# EAGLE board NQSMHS-V2.5 (EAGLE 6.5.0)
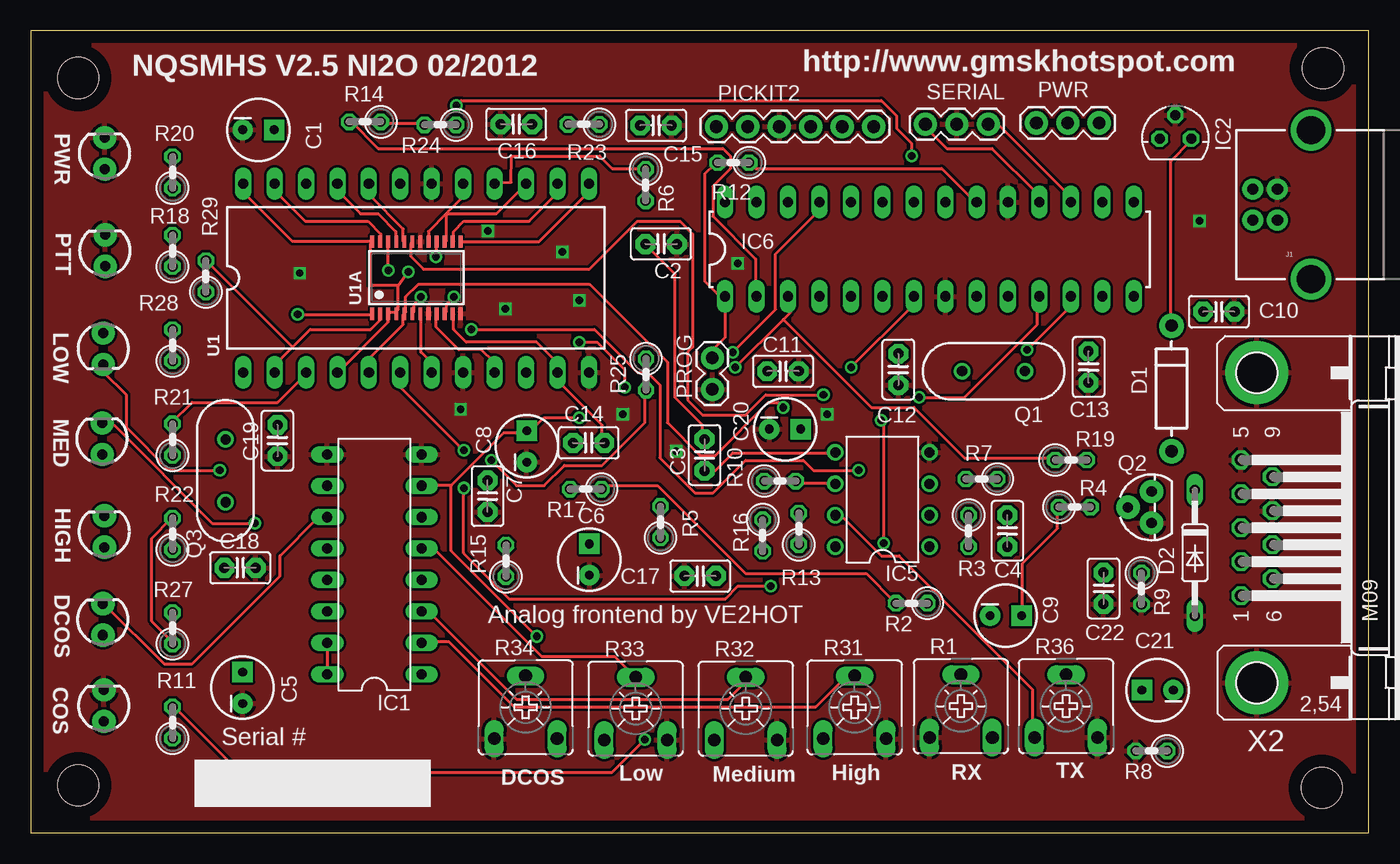
[diagram p0: board, top side]
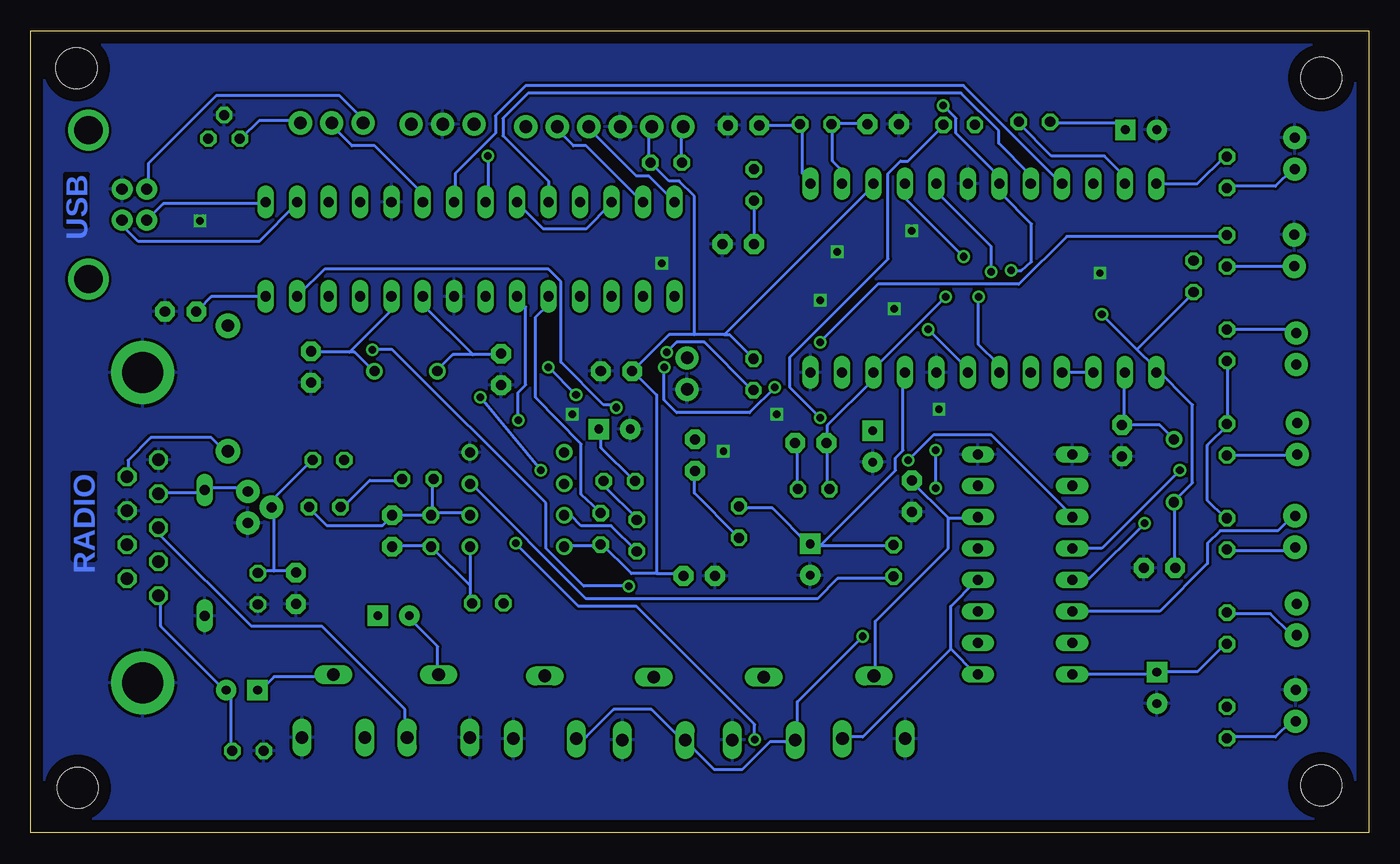
[diagram p1: board, bottom side, seen from below]

Size 108.03 x 64.76 mm. Coordinates in mm from the lower left corner, seen from the top.
Outline: 108.03,0 108.03,64.76 0,64.76 0,0 108.03,0
Copper layers (1*16): Top 0.035mm / dielectric 1.5mm / Bottom 0.035mm
Design rules "default": minimum track width 10mil, minimum drill 24mil, track to track 8mil, track to pad 8mil, pad to pad 8mil, via to via 8mil, smd to smd 8mil, copper to edge 40mil, drill to drill 8mil, minimum pad ring 10mil, minimum via ring 8mil, stop-mask expansion 4mil, vias tented up to drill 0mil, thermal gap 10mil

## Footprints (pad centres in the part's own frame; a part is rotated, then mirrored left to right if it is on the bottom)
CPOL-RADIAL-10UF-25V = drill 0.7 pad 1.651 square: 1 1.27,0 | drill 0.7 pad 1.651: 2 -1.27,0
C2.5-2 = drill 0.813 pad 1.6 octagon: 1 -1.27,0; 2 1.27,0
DIODE-1N4001 = drill 1 pad 1.981: A -5.08,0; C 5.08,0
DO35-10 = drill 0.813 long: A 5.08,0; C -5.08,0
DIL16 = drill 0.813 long: 1 -8.89,-3.81; 2 -6.35,-3.81; 3 -3.81,-3.81; 4 -1.27,-3.81; 5 1.27,-3.81; 6 3.81,-3.81; 7 6.35,-3.81; 8 8.89,-3.81; 9 8.89,3.81; 10 6.35,3.81; 11 3.81,3.81; 12 1.27,3.81; 13 -1.27,3.81; 14 -3.81,3.81; 15 -6.35,3.81; 16 -8.89,3.81
78LXX = drill 0.813 octagon: GND 0,1.905; IN 1.27,0; OUT -1.27,0
DIL08 = drill 0.813 pad 1.27: 1 -3.81,-3.81; 2 -1.27,-3.81; 3 1.27,-3.81; 4 3.81,-3.81; 5 3.81,3.81; 6 1.27,3.81; 7 -1.27,3.81; 8 -3.81,3.81
DIL28-3 = drill 0.813 long: 1 -16.51,-3.81; 2 -13.97,-3.81; 3 -11.43,-3.81; 4 -8.89,-3.81; 5 -6.35,-3.81; 6 -3.81,-3.81; 7 -1.27,-3.81; 8 1.27,-3.81; 9 3.81,-3.81; 10 6.35,-3.81; 11 8.89,-3.81; 12 11.43,-3.81; 13 13.97,-3.81; 14 16.51,-3.81; 15 16.51,3.81; 16 13.97,3.81; 17 11.43,3.81; 18 8.89,3.81; 19 6.35,3.81; 20 3.81,3.81; 21 1.27,3.81; 22 -1.27,3.81; 23 -3.81,3.81; 24 -6.35,3.81; 25 -8.89,3.81; 26 -11.43,3.81; 27 -13.97,3.81; 28 -16.51,3.81
USB-B-PTH = drill 0.914 pad 1.676: D+ 0,1.25; D- 1.981,1.25; GND 0,-1.25; VBUS 1.981,-1.25 | drill 2.286: P$1 -2.718,-6.02; P$2 -2.718,6.02
STAND-OFF = hole 3.302: 0,0
LED3MM = drill 0.813 pad 1.88: A -1.27,0; K 1.27,0
1X06 = drill 1.016 pad 1.88: 1 0,0; 2 2.54,0; 3 5.08,0; 4 7.62,0; 5 10.16,0; 6 12.7,0
1X02 = drill 1.016 pad 1.88: 1 0,0; 2 2.54,0
1X03 = drill 1.016 pad 1.88: 1 0,0; 2 2.54,0; 3 5.08,0
HC49US = drill 0.813: 1 -2.54,0; 2 2.54,0
TO-92 = drill 0.813 pad 1.88: 1 -1.27,0; 2 0,1.905; 3 1.27,0
CA6V = drill 1.016 long: A -2.54,-2.54; E 2.54,-2.54; S 0,2.54
0207/2V = drill 0.813 octagon: 1 -1.27,0; 2 1.27,0
DIL24-6 = drill 0.813 long: 1 -13.97,-7.62; 2 -11.43,-7.62; 3 -8.89,-7.62; 4 -6.35,-7.62; 5 -3.81,-7.62; 6 -1.27,-7.62; 7 1.27,-7.62; 8 3.81,-7.62; 9 6.35,-7.62; 10 8.89,-7.62; 11 11.43,-7.62; 12 13.97,-7.62; 13 13.97,7.62; 14 11.43,7.62; 15 8.89,7.62; 16 6.35,7.62; 17 3.81,7.62; 18 1.27,7.62; 19 -1.27,7.62; 20 -3.81,7.62; 21 -6.35,7.62; 22 -8.89,7.62; 23 -11.43,7.62; 24 -13.97,7.62
TSSOP24 = smd 0.305 x 0.991: 1 -3.575,-2.918; 2 -2.925,-2.918; 3 -2.275,-2.918; 4 -1.625,-2.918; 5 -0.975,-2.918; 6 -0.325,-2.918; 7 0.325,-2.918; 8 0.975,-2.918; 9 1.625,-2.918; 10 2.275,-2.918; 11 2.925,-2.918; 12 3.575,-2.918; 13 3.575,2.918; 14 2.925,2.918; 15 2.275,2.918; 16 1.625,2.918; 17 0.975,2.918; 18 0.325,2.918; 19 -0.325,2.918; 20 -0.975,2.918; 21 -1.625,2.918; 22 -2.275,2.918; 23 -2.925,2.918; 24 -3.575,2.918
M09HP = drill 1.016 octagon: 1 -5.486,1.27; 2 -2.743,1.27; 3 0,1.27; 4 2.743,1.27; 5 5.486,1.27; 6 -4.115,-1.27; 7 -1.372,-1.27; 8 1.372,-1.27; 9 4.115,-1.27 | drill 3.302 pad 5.08: G1 -12.522,0; G2 12.522,0

## Placement (x,y rotation side)
C1  10uF  [CPOL-RADIAL-10UF-25V]  18.37,56.78 0 top
C2  470pF  [C2.5-2]  50.9,47.55 180 top
C3  0.22uF  [C2.5-2]  54.4,30.5 90 top
C4  330p  [C2.5-2]  78.86,24.37 270 top
C5  47uF  [CPOL-RADIAL-10UF-25V]  17.09,11.7 90 top
C6  1uF  [CPOL-RADIAL-10UF-25V]  45.1,22.06 90 top
C7  0.1uF  [C2.5-2]  36.88,27.18 270 top
C8  10uF  [CPOL-RADIAL-10UF-25V]  40.04,31.19 90 top
C9  10uF  [CPOL-RADIAL-10UF-25V]  78.73,17.52 0 top
C10  0.1uF  [C2.5-2]  95.94,42.08 0 top
C11  0.1uF  [C2.5-2]  60.74,37.27 0 top
C12  22pF  [C2.5-2]  70.05,37.41 90 top
C13  22pF  [C2.5-2]  85.42,37.61 270 top
C14  22pF  [C2.5-2]  45.04,31.49 180 top
C15  0.027uF  [C2.5-2]  50.48,57.13 0 top
C16  0.027uF  [C2.5-2]  39.2,57.23 180 top
C17  0.1uF  [C2.5-2]  54.05,20.73 0 top
C18  22pF  [C2.5-2]  16.89,21.39 0 top
C19  22pF  [C2.5-2]  19.91,31.67 90 top
C20  [CPOL-RADIAL-10UF-25V]  60.9,32.6 0 top
C21  22uF  [CPOL-RADIAL-10UF-25V]  90.99,11.52 180 top
C22  100pF  [C2.5-2]  86.63,19.73 90 top
D1  1N4001  [DIODE-1N4001]  92.11,35.88 90 top
D2  1N4148  [DO35-10]  94,22.6 270 top
IC1  MAX8213  [DIL16]  27.74,21.67 90 top
IC2  78L05  [78LXX]  92.43,56.06 0 top
IC5  LM4558N  [DIL08]  68.77,26.91 90 top
IC6  PIC18F2550  [DIL28-3]  72.57,47.13 0 top
J1  USBPTH  [USB-B-PTH]  100.67,50.73 180 top
JP7  STAND-OFF  [STAND-OFF]  3.81,3.81 0 top
JP8  STAND-OFF  [STAND-OFF]  104.25,3.61 0 top
JP9  STAND-OFF  [STAND-OFF]  3.81,60.96 0 top
JP10  STAND-OFF  [STAND-OFF]  104.35,61.76 0 top
LED1  COS  [LED3MM]  5.89,10.26 90 top
LED2  MED  [LED3MM]  5.75,31.82 90 top
LED3  PWR  [LED3MM]  5.96,54.87 90 top
LED8  PTT  [LED3MM]  5.99,47.02 90 top
LED10  LOW  [LED3MM]  5.83,39.08 270 top
LED11  DCOS  [LED3MM]  5.81,17.22 90 top
LED12  HIGH  [LED3MM]  5.93,24.32 90 top
PICKIT2  PICKIT2  [1X06]  55.36,57.03 0 top
PROG  Program  [1X02]  55.04,35.8 90 top
PWR  PWR  [1X03]  86.28,57.33 180 top
Q1  24MHz  [HC49US]  77.75,37.27 180 top
Q2  2N3904  [TO-92]  90.51,26.28 90 top
Q3  4.9152MHz  [HC49US]  15.72,29.23 90 top
R1  1K  [CA6V]  75.11,10.22 0 top
R2  100K  [0207/2V]  71.14,18.52 180 top
R3  180K  [0207/2V]  75.72,24.37 270 top
R4  75K  [0207/2V]  84.3,26.3 0 top
R5  510K  [0207/2V]  50.85,25.09 90 top
R6  100K  [0207/2V]  49.65,52.31 270 top
R7  75K  [0207/2V]  76.79,28.56 180 top
R8  10K  [0207/2V]  90.5,6.6 180 top
R9  10K  [0207/2V]  89.7,19.7 270 top
R10  [0207/2V]  60.5,28.4 0 top
R11  1K  [0207/2V]  11.43,8.89 90 top
R12  10K  [0207/2V]  56.73,54.12 180 top
R13  47K  [0207/2V]  62.02,24.54 90 top
R14  27K  [0207/2V]  26.99,57.42 180 top
R15  510K  [0207/2V]  38.36,21.95 90 top
R16  0R  [0207/2V]  59.1,24 270 top
R17  100K  [0207/2V]  44.81,27.75 180 top
R18  4k7  [0207/2V]  11.43,46.99 90 top
R19  1K  [0207/2V]  84,30.1 0 top
R20  1K  [0207/2V]  11.43,53.34 90 top
R21  470R  [0207/2V]  11.43,31.75 90 top
R22  470R  [0207/2V]  11.43,24.13 90 top
R23  1M  [0207/2V]  44.64,57.22 180 top
R24  27K  [0207/2V]  33.06,57.18 180 top
R25  47K  [0207/2V]  49.67,37.01 270 top
R27  470R  [0207/2V]  11.43,16.51 90 top
R28  470R  [0207/2V]  11.43,39.37 90 top
R29  1M  [0207/2V]  14.13,44.93 90 top
R31  100K  [CA6V]  66.52,10.12 0 top
R32  100K  [CA6V]  57.73,10.02 0 top
R33  100K  [CA6V]  48.84,10.02 0 top
R34  10K  [CA6V]  39.95,10.12 0 top
R36  4k7  [CA6V]  83.6,10.22 0 top
SERIAL  SERIAL  [1X03]  72.24,57.23 0 top
U1  CMX589AP4  [DIL24-6]  31.1,44.8 0 top
U1A  CMX589AE2  [TSSOP24]  31.13,44.83 0 top
X2  DB9M  [M09HP]  99,24.63 90 top

## Library data of the parts
C1 C5 C6 C8 C9 C20 C21 D1 IC6 J1 JP7-JP10 LED1-LED3 LED8 LED10-LED12 PICKIT2 PROG PWR Q1-Q3 SERIAL = SparkFun
C2-C4 C7 C10-C19 C22 = capacitor-wima
D2 = diode-1
IC1 = ic-package
IC2 = v-reg
IC5 = linear
R1 R31-R34 R36 = pot
R2-R25 R27-R29 = resistor
U1 U1A = cml-micro
X2 = con-subd

## Nets
+5V: J1.VBUS PWR.3
+12V: D1.A X2.9
COS/COR/SQL: X2.2
DCOS: IC1.11 IC6.25 LED11.K R25.2
GND: C1.2 C2.1 C5.2 C6.2 C7.2 C8.2 C10.2 C11.2 C12.1 C13.2 C15.2 C16.2 C17.1 C18.2 C19.1 C20.2 C22.1 D2.A IC1.8 IC1.9 IC2.GND IC5.4 IC6.8 IC6.19 J1.GND LED1.K LED3.K LED8.K PICKIT2.3 PROG.1 Q2.1 R1.A R8.2 R9.2 R31.E R32.E R33.E R34.A R36.E SERIAL.2 U1.8 U1.12 U1.18 U1A.8 U1A.12 U1A.18 X2.5 X2.8 X2.G1 X2.G2
N$1: C15.1 R23.1 U1.13 U1A.13
N$2: D1.C IC2.IN
N$3: IC6.23 IC6.26
N$4: IC6.5 R13.2
N$5: IC6.6 R11.2
N$6: LED1.A R11.1
N$8: C2.2 C3.2 R6.2
N$9: C12.2 IC6.9 Q1.2
N$10: C13.1 IC6.10 Q1.1
N$11: C10.1 IC6.14
N$12: IC2.OUT PWR.1
N$13: LED3.A R20.1
N$14: C7.1 IC1.6 R34.S
N$15: C22.2 Q2.2 R9.1 R19.2
N$16: IC1.14 LED12.K
N$17: LED8.A R18.1
N$18: C9.2 R1.S
N$19: IC5.7 R16.2 R36.A
N$20: C9.1 R4.1 R7.1
N$21: C16.1 R23.2 U1.14 U1A.14
N$22: C18.1 Q3.1 R29.1 U1.1 U1A.1
N$23: C4.2 IC5.1 R2.1 R3.2
N$24: C19.2 Q3.2 R29.2 U1.2 U1A.2
N$25: C3.1 IC5.5 R5.1
N$26: C4.1 IC5.2 R3.1 R4.2 R7.2
N$27: IC5.6 R10.2 R16.1
N$28: C20.1 R10.1
N$29: C21.1 R36.S
N$32: U1.22
N$40: IC5.3 R15.1
N$41: LED12.A R22.1
N$44: IC1.13 LED2.K
N$45: LED2.A R21.1
N$46: IC1.12 LED10.K
N$47: LED11.A R27.2
N$48: LED10.A R28.2
N$49: IC1.2 R31.S
N$50: IC1.3 R32.S
N$51: IC1.5 R33.S
N$52: IC1.1 IC1.4 R34.E
N$53: C8.1 IC1.7 R24.1 R31.A R32.A R33.A
PGC: IC6.27 PICKIT2.5
PGD: IC6.28 PICKIT2.4
PLLACQ: IC6.11 U1.7 U1A.7
PTT: IC6.3 R18.2 R19.1
RCFB: C14.2 R17.2 U1.10 U1A.10
RPT: IC6.4
RX-232: IC6.18 SERIAL.1
RXCLOCK: IC6.21 U1.21 U1A.21
RXDATA: IC6.24 U1.20 U1A.20
RXDATA/SPKR: R1.E X2.3
RXDCACQ: IC6.12 U1.6 U1A.6
RXHOLD: IC6.13 U1.5 U1A.5
RXSIGIN: C14.1 R2.2 R17.1 U1.11 U1A.11
RXSN: R14.1 R24.2 U1.23 U1A.23
TRXPTT: D2.C Q2.3 X2.4
TX-232: IC6.17 SERIAL.3
TX/SN: C1.1 IC6.2 R14.2
TXCLOCK: IC6.22 U1.19 U1A.22
TXDATA: IC6.7 U1A.19
TXDATA/MIC: C21.2 R8.1 X2.1
TXOUT: R6.1 U1.16 U1A.16
USB+: IC6.16 J1.D+
USB-: IC6.15 J1.D-
VBIAS: C6.1 R5.2 R15.2 U1.9 U1A.9
VCC: C5.1 C11.1 C17.2 IC1.15 IC1.16 IC5.8 IC6.20 PICKIT2.2 PWR.2 R12.1 R13.1 R20.2 R21.2 R22.2 R25.1 R27.1 R28.1 U1.3 U1.4 U1.15 U1.17 U1.24 U1A.3 U1A.4 U1A.15 U1A.17 U1A.24
VPP: IC6.1 PICKIT2.1 PROG.2 R12.2

## Tracks (layer width: path | path; a pad name or v marks a point on that pad's centre or on a via)
+5V
  Bottom 0.254: J1.VBUS 98.55,52.02 98.55,54.05 93.07,59.54 83.11,59.54 81.08,57.51 PWR.3
+12V
  Bottom 0.254: X2.9 100.18,28.85 100.18,30.07 98.35,31.9 93.47,31.9 92.25,30.68 D1.A
DCOS  (via drill 0.61)
  Top 0.254: IC1.11 23.77,25.4 23.16,25.4 20.12,22.35 20.12,20.73 13.01,13.61 10.77,13.61 5.89,18.49 LED11.K | v56.69,38.81 60.15,42.27 60.15,46.74 63.6,50.19 63.6,50.8 IC6.25 | v37.19,30.07 39.22,28.04 41.45,28.04 43.08,29.67 46.13,29.67 49.58,33.12 49.58,35.56 R25.2
  Bottom 0.254: v56.69,38.81 55.88,39.62 53.65,39.62 49.78,35.76 R25.2 | v37.19,30.07 35.15,32.11 30.48,32.11 23.98,25.6 IC1.11
GND  (via drill 0.6)
  other vias: 44.3,43 47.8,33.8 42.9,46.9 57.1,46 34.7,34.2 38.3,42.3 36.9,48.6 52.1,30.8 21.7,45.2 94.4,49.4 64.3,33.8
  pour Bottom: -0.1,64.77 108.06,64.87 107.96,0 0,0
  pour Top: 0,-0.23 107.95,-0.03 108.05,64.85 0.1,64.75
N$1
  Top 0.254: U1A.13 34.75,47.75 41.05,47.75 44.91,51.61 44.91,52.22 U1.13
  Bottom 0.254: C15.1 49.17,57.1 45.92,57.1 R23.1 45.72,57.1 45.72,53.24 44.91,52.43 U1.13
N$2
  Top 0.254: IC2.IN 93.67,55.88 92.05,54.25 92.05,41.05 D1.C
N$3
  Bottom 0.254: IC6.26 61.16,50.8 63.2,48.77 66.65,48.77 68.68,50.8 IC6.23
N$4
  Bottom 0.254: R13.2 62.18,26.01 63.6,27.33 63.6,31.39 67.26,35.15 67.26,41.66 66.24,42.67 66.24,43.28 IC6.5
N$5  (via drill 0.61)
  Top 0.254: v49.58,7.52 46.94,4.88 16.87,4.88 11.58,10.16 R11.2 | v68.89,23.37 68.89,33.12 v68.68,33.33
  Bottom 0.254: v49.58,7.52 49.58,8.74 59.13,18.29 63.8,18.29 v68.89,23.37 | v68.68,33.33 68.68,35.56 68.07,36.17 68.07,42.47 68.89,43.28 IC6.6
N$6
  Bottom 0.254: R11.1 11.38,7.72 7.52,7.72 6.3,8.94 5.89,8.94 LED1.A
N$8
  Top 0.254: C3.2 54.25,31.9 54.25,32.92 52.02,35.15 52.02,45.11 49.58,47.55 C2.2
  Bottom 0.254: R6.2 49.58,51 49.58,47.75 C2.2
N$9
  Bottom 0.254: 72.34,38.61 70.1,38.61 C12.2 | 72.34,38.61 73.97,38.61 75.18,37.39 Q1.2 | 72.34,38.61 76.2,42.47 76.2,43.28 IC6.9
N$10
  Bottom 0.254: 82.3,38.81 85.34,38.81 C13.1 | 82.3,38.81 81.89,38.81 80.47,37.39 Q1.1 | 82.3,38.81 79.05,42.06 79.05,43.28 IC6.10
N$11
  Bottom 0.254: IC6.14 89.2,43.28 93.47,43.28 94.49,42.27 C10.1
N$12
  Bottom 0.254: IC2.OUT 91.03,56.08 89.61,57.51 86.36,57.51 PWR.1
N$13
  Bottom 0.254: R20.1 11.38,52.22 7.52,52.22 6.1,53.65 LED3.A
N$14
  Bottom 0.254: 33.93,25.4 31.7,25.4 IC1.6 | 33.93,25.4 36.98,28.45 C7.1 | 33.93,25.4 33.93,22.96 39.83,17.07 39.83,12.8 R34.S
N$15
  Bottom 0.254: 88.39,21.13 86.77,21.13 C22.2 | 88.39,21.13 89.61,21.13 R9.1 | 88.39,27.03 88.59,26.82 88.59,26.42 Q2.2 88.39,27.03 | 88.39,27.03 85.34,30.07 R19.2 | 88.39,21.13 88.39,27.03
N$16
  Bottom 0.254: IC1.14 23.77,17.88 16.87,17.88 13.01,21.74 13.01,23.37 11.99,24.38 7.32,24.38 6.1,25.6 LED12.K
N$17
  Bottom 0.254: R18.1 6.1,45.72 LED8.A
N$18
  Bottom 0.254: R1.S 75.18,12.8 75.18,15.04 77.62,17.48 C9.2
N$19
  Top 0.254: R36.A 80.87,7.72 80.87,11.58 70.1,22.35 68.68,22.35 65.43,25.6 65.02,25.6 IC5.7
  Bottom 0.254: R16.2 59.13,22.76 61.16,24.79 63.6,24.79 64.41,25.6 64.82,25.6 IC5.7
N$20
  Top 0.254: C9.1 80.06,17.68 80.06,21.74 82.91,24.59 82.91,26.21 R4.1
  Bottom 0.254: R7.1 78.23,28.45 80.67,28.45 82.91,26.21 R4.1
N$21
  Top 0.254: U1A.14 34.14,47.75 34.14,48.56 34.95,49.38 40.23,49.38 42.47,51.61 42.47,52.22 U1.14
  Bottom 0.254: C16.1 40.64,57.3 43.28,57.3 R23.2 43.28,57.1 43.28,54.25 42.67,53.65 42.67,52.43 U1.14
N$22  (via drill 0.61)
  Top 0.254: v21.54,41.86 27.43,41.86 U1A.1
  Bottom 0.254: C18.1 15.65,21.54 15.65,26.62 Q3.1 15.65,26.82 14.22,28.25 14.22,34.54 17.27,37.59 | 17.27,37.59 18.69,39.01 | 18.69,39.01 v21.54,41.86 | 17.27,37.59 17.27,37.19 U1.1 17.27,37.59 | 18.69,39.01 14.22,43.48 R29.1
N$23
  Bottom 0.254: C4.2 78.84,23.16 75.79,23.16 R3.2 75.59,22.96 72.54,19.91 | 72.54,19.91 72.54,22.96 IC5.1 | 72.54,19.91 72.54,18.69 R2.1
N$24
  Top 0.254: 21.13,39.22 19.71,37.8 19.71,37.19 U1.2 | 21.13,39.22 22.55,40.64 27.43,40.64 28.25,41.45 28.25,41.86 U1A.2 | 21.13,39.22 14.22,46.13 R29.2
  Bottom 0.254: Q3.2 15.85,31.9 16.87,32.92 19.71,32.92 C19.2 19.71,33.12 19.71,36.98 U1.2
N$25
  Top 0.254: IC5.5 64.82,30.68 56.69,30.68 55.27,29.26 54.46,29.26 C3.1
  Bottom 0.254: R5.1 51,23.98 54.46,27.43 54.46,29.06 C3.1
N$26
  Bottom 0.254: 75.59,25.81 72.75,25.81 IC5.2 | 75.59,25.81 75.59,28.45 R7.2 | 75.59,25.81 R3.1 75.79,25.6 78.84,25.6 | 78.84,25.6 79.65,24.79 84.12,24.79 85.55,26.21 R4.2 | 78.84,25.6 C4.1
N$27
  Top 0.254: IC5.6 64.82,28.25 61.77,28.25 R10.2
  Bottom 0.254: R16.1 59.13,25.4 61.57,27.84 61.57,28.25 R10.2
N$28
  Bottom 0.254: R10.1 59.33,28.45 61.98,31.09 61.98,32.72 C20.1
N$29
  Bottom 0.254: R36.S 83.72,12.6 88.39,12.6 89.61,11.38 C21.1
N$40
  Bottom 0.254: R15.1 38.41,20.52 42.88,20.52 44.5,18.9 63.2,18.9 72.54,28.25 IC5.3
N$41
  Bottom 0.254: R22.1 11.38,22.76 6.3,22.76 6.1,22.96 LED12.A
N$44  (via drill 0.61)
  Top 0.254: v18.09,24.99 14.63,24.99 6.71,32.92 5.89,32.92 LED2.K
  Bottom 0.254: v18.09,24.99 22.55,20.52 23.77,20.52 IC1.13
N$45
  Bottom 0.254: R21.1 5.89,30.48 LED2.A
N$46  (via drill 0.61)
  Top 0.254: v15.24,29.26 11.18,29.26 7.72,32.72 7.72,35.36 5.89,37.19 5.89,37.8 LED10.K
  Bottom 0.254: v15.24,29.26 21.54,22.96 23.77,22.96 IC1.12
N$47
  Bottom 0.254: R27.2 11.38,17.68 7.92,17.68 6.3,16.05 5.89,16.05 LED11.A
N$48
  Bottom 0.254: R28.2 6.1,40.64 5.89,40.44 LED10.A
N$49
  Top 0.254: IC1.2 31.7,15.44 33.73,15.44 39.01,10.16 63.4,10.16 65.84,12.6 66.45,12.6 R31.S
N$50
  Top 0.254: IC1.3 31.7,17.68 32.31,17.68 39.22,10.77 56.29,10.77 57.91,12.39 R32.S
N$51
  Top 0.254: IC1.5 31.7,22.76 32.72,22.76 41.25,14.22 47.14,14.22 48.77,12.6 R33.S
N$52
  Bottom 0.254: 33.73,14.83 31.7,12.8 IC1.1 | 33.73,14.83 33.73,18.29 31.7,20.32 IC1.4 | 33.73,14.83 40.84,7.72 42.47,7.72 R34.E
N$53  (via drill 0.61)
  Top 0.254: 33.93,28.04 31.7,28.04 IC1.7 | 33.93,28.04 38.2,32.31 40.03,32.31 C8.1 40.23,32.31 41.45,33.53 v44.3,33.53 | v40.84,15.85 33.93,22.76 33.93,28.04
  Bottom 0.254: R31.A 63.8,7.72 63.2,7.72 60.96,9.96 57.91,9.96 55.27,7.32 R32.A 55.07,7.32 52.83,5.08 50.6,5.08 48.36,7.32 46.33,7.32 R33.A 46.13,7.52 46.13,10.57 v40.84,15.85 | v44.3,33.53 46.74,35.97 46.74,38.41 38.81,46.33 38.81,53.24 37.8,54.25 37.19,54.25 34.34,57.1 R24.1
PGC
  Bottom 0.254: IC6.27 58.73,51 63.2,55.47 64.21,55.47 65.63,56.9 PICKIT2.5
PGD
  Bottom 0.254: IC6.28 56.08,51 58.12,53.03 59.13,53.03 62.99,56.9 PICKIT2.4
PLLACQ  (via drill 0.61)
  Top 0.254: U1A.7 31.5,41.86 31.5,38.81 32.31,38 32.31,37.19 U1.7 | v71.73,35.15 75.39,35.15 81.28,41.05 81.28,43.28 IC6.11 | v66.84,29.26 63.2,29.26 62.38,30.07 57.71,30.07 55.07,27.43 53.65,27.43 50.8,30.28 50.8,36.17 49.78,37.19 48.97,37.19 45.52,40.64 v35.56,40.64
  Bottom 0.254: v66.84,29.26 v71.73,35.15 | v35.56,40.64 32.51,37.59 32.51,37.19 U1.7
PTT  (via drill 0.61)
  Top 0.254: v44.3,39.62 45.72,39.62 47.95,37.39 v47.95,35.97 | 60.76,41.45 61.37,42.06 61.37,43.08 61.16,43.28 IC6.3 | v56.9,37.59 60.76,41.45 | 60.76,41.45 67.87,34.34 71.32,34.34 75.39,30.28 82.7,30.28 R19.1
  Bottom 0.254: v44.3,39.62 39.62,44.3 28.25,44.3 24.38,48.16 11.58,48.16 R18.2 | v47.95,35.97 49.99,33.93 55.88,33.93 56.9,34.95 v56.9,37.59
RCFB  (via drill 0.61)
  Top 0.254: v34.14,43.28 33.53,42.67 33.53,42.06 U1A.10
  Bottom 0.254: R17.2 43.69,27.84 43.69,31.29 C14.2 43.69,31.5 43.69,32.92 40.03,36.58 40.03,36.98 U1.10 39.83,37.19 39.83,37.59 v34.14,43.28
RX-232
  Top 0.254: IC6.18 81.28,51 81.28,51.61 77.62,55.27 73.97,55.27 72.14,57.1 SERIAL.1
RXCLOCK
  Top 0.254: U1A.21 29.46,47.75 29.46,48.56 28.04,49.99 26.62,49.99 24.79,51.82 24.79,52.22 U1.21
  Bottom 0.254: IC6.21 73.76,51 73.76,53.24 70.51,56.49 70.51,57.91 68.07,60.35 32.72,60.35 24.79,52.43 U1.21
RXDATA
  Top 0.254: U1A.20 30.07,47.75 30.07,48.77 27.43,51.41 27.43,52.22 U1.20
  Bottom 0.254: IC6.24 66.24,51 66.24,52.63 69.9,56.29 69.9,57.71 67.87,59.74 32.92,59.74 29.87,56.69 29.87,55.68 27.43,53.24 27.43,52.43 U1.20
RXDATA/SPKR
  Bottom 0.254: R1.E 77.83,7.72 77.83,9.96 84.53,16.66 90.22,16.66 97.54,23.98 97.54,24.59 X2.3
RXDCACQ  (via drill 0.61)
  Top 0.254: v31.5,43.28 30.89,42.67 30.89,42.06 U1A.6 | v80.47,39.01 83.92,42.47 83.92,43.28 IC6.12 | v59.74,19.91 57.1,19.91 56.08,18.9 38.61,18.9 34.95,22.55 v34.95,27.84 | v34.95,30.89 29.87,35.97 29.87,36.98 U1.6
  Bottom 0.254: v31.5,43.28 31.5,39.42 29.87,37.8 29.87,37.19 U1.6 | v80.47,39.01 78.84,39.01 66.45,26.62 66.45,22.96 63.4,19.91 v59.74,19.91 | v34.95,27.84 v34.95,30.89
RXHOLD  (via drill 0.61)
  Top 0.254: U1.5 27.43,37.19 27.43,38.41 30.07,41.05 30.07,41.86 U1A.5 30.28,42.06 30.28,43.28 31.29,44.3 45.11,44.3 51.41,38 51.41,33.12 54.05,30.48 55.27,30.48 59.54,34.75 60.35,34.75 v60.76,34.34
  Bottom 0.254: v60.76,34.34 60.96,34.54 61.77,34.54 65.23,38 65.23,44.5 66.24,45.52 84.33,45.52 86.36,43.48 IC6.13
RXSIGIN
  Top 0.254: U1A.11 34.14,41.86 34.14,40.64 35.15,39.62 40.84,39.62 42.47,38 42.47,37.19 U1.11 42.67,36.98 42.67,36.37 46.13,32.92 46.13,31.5 C14.1 | R2.2 69.7,18.69 67.46,20.93 57.71,20.93 50.6,28.04 46.33,28.04 46.13,27.84 R17.1
  Bottom 0.254: R17.1 46.13,27.84 46.13,31.29 C14.1
RXSN
  Top 0.254: R14.1 28.45,57.3 31.7,57.3 R24.2 | U1A.23 28.25,47.75 28.25,48.36 27.23,49.38 22.15,49.38 19.71,51.82 19.71,52.22 U1.23
  Bottom 0.254: R14.1 28.25,57.3 25.6,54.66 21.34,54.66 19.71,53.03 19.71,52.43 U1.23
TRXPTT
  Bottom 0.254: Q2.3 90.63,27.64 90.83,27.84 93.88,27.84 D2.C 94.08,27.64 94.28,27.43 97.54,27.43 X2.4
TX-232
  Top 0.254: IC6.17 83.92,51 83.92,51.41 78.23,57.1 77.42,57.1 SERIAL.3
TX/SN
  Top 0.254: IC6.2 58.52,43.48 58.52,46.33 55.07,49.78 55.07,52.22 56.49,53.65 56.49,54.66 55.88,55.27 28.04,55.27 25.81,57.51 R14.2
  Bottom 0.254: R14.2 25.6,57.3 20.12,57.3 19.71,56.9 C1.1
TXCLOCK  (via drill 0.61)
  Top 0.254: v28.86,45.43 28.85,46.94 28.85,47.55 U1A.22 | v71.12,54.66 71.12,55.68 69.9,56.9 69.9,57.91 68.68,59.13 34.75,59.13 v34.34,58.73
  Bottom 0.254: v28.86,45.43 28.45,45.41 28.04,45.41 27.23,46.13 27.23,49.17 29.67,51.61 29.67,52.22 U1.19 29.87,52.43 29.87,53.03 33.33,56.49 33.33,57.71 v34.34,58.73 | v71.12,54.66 71.12,51 IC6.22
TXDATA  (via drill 0.61)
  Top 0.254: v64.01,35.36 59.33,35.36 57.71,33.73 54.25,33.73 53.03,34.95 53.03,38.81 53.44,39.22 53.44,48.36 52.43,49.38 48.97,49.38 45.11,45.52 31.7,45.52 30.68,46.53 30.68,47.55 U1A.19 | v66.24,37.59 71.12,42.47 71.12,43.28 IC6.7
  Bottom 0.254: v64.01,35.36 v66.24,37.59
TXDATA/MIC
  Bottom 0.254: R8.1 91.85,6.71 91.85,10.97 92.25,11.38 C21.2 92.46,11.58 97.54,16.66 97.54,19.1 X2.1
TXOUT  (via drill 0.61)
  Top 0.254: v32.72,46.53 32.72,47.55 U1A.16 | R6.1 49.58,53.65 46.94,53.65 45.92,54.66 38.81,54.66 38.79,52.54 37.49,52.53 U1.16
  Bottom 0.254: v32.72,46.53 37.39,51.21 37.39,52.22 U1.16
USB+
  Bottom 0.254: IC6.16 86.56,50.8 89.61,47.75 99.36,47.75 100.58,48.97 100.58,49.38 J1.D+
USB-
  Bottom 0.254: IC6.15 89.2,50.8 97.33,50.8 98.55,49.58 J1.D-
VBIAS
  Top 0.254: U1A.9 32.72,41.86 32.72,40.84 34.54,39.01 36.37,39.01 37.39,38 37.39,37.19 U1.9
  Bottom 0.254: 44.3,23.16 44.91,23.16 C6.1 | 44.3,23.16 38.41,23.16 R15.2 | R5.2 50.8,26.21 48.16,26.21 45.11,23.16 C6.1 | 44.3,23.16 38.2,29.26 38.2,30.28 37.59,30.89 37.59,36.98 U1.9 | 44.3,23.16 C6.1
VCC  (via drill 0.61)
  Top 0.254: 29.46,42.06 28.85,42.06 U1A.3 28.85,41.86 28.85,41.25 24.79,37.19 U1.4 | 29.65,44.19 29.67,42.47 29.67,42.27 29.46,42.06 | 29.65,44.19 27.43,44.2 27.43,47.55 U1A.24 27.43,47.75 21.13,47.75 17.27,51.61 17.27,52.22 U1.24 | 29.46,42.06 U1A.4 | IC1.16 23.98,12.8 23.98,15.24 IC1.15 | R22.2 11.38,25.4 9.75,23.77 9.75,17.07 11.58,15.24 R27.1 | U1.3 22.15,36.98 19.91,34.75 13.01,34.75 11.38,33.12 R21.2 | 33.53,49.99 34.75,51.21 34.75,52.22 U1.17 | 33.53,49.99 32.11,48.56 U1A.17 | 33.53,49.99 33.53,47.75 U1A.15 | 33.53,49.99 37.59,49.99 39.83,52.22 U1.15 | IC6.20 76.2,51 73.56,53.65 58.52,53.65 58.12,54.05 R12.1 | 29.65,44.19 v30.48,45.31
  Bottom 0.254: U1.24 17.07,52.43 13.82,52.43 11.58,54.66 R20.2 | U1.3 22.35,37.19 24.59,37.19 U1.4 | R22.2 11.58,25.4 13.01,26.82 13.01,31.29 11.38,32.92 R21.2 11.38,33.12 11.38,38 R28.1 | R27.1 11.58,15.24 13.82,13.01 17.07,13.01 C5.1 17.27,12.8 23.77,12.8 IC1.16 | IC6.20 76.4,51 76.4,51.61 80.26,55.47 82.09,55.47 83.92,57.3 PWR.2 | IC5.8 64.82,23.16 62.18,23.16 R13.1 61.98,23.37 59.54,20.93 57.51,20.93 | 57.51,20.93 55.47,20.93 C17.2 | PICKIT2.2 57.91,56.9 58.12,56.69 58.12,54.25 R12.1 57.91,54.05 56.49,52.63 55.68,52.63 54.46,51.41 54.46,40.23 | 54.46,40.23 56.49,40.23 59.33,37.39 C11.1 59.33,37.19 57.51,35.36 57.51,20.93 | 52.02,40.23 54.46,40.23 | 52.02,40.23 51.61,40.23 49.78,38.41 R25.1 | 52.02,40.23 40.03,52.22 U1.15 | v30.48,45.31 30.48,47.35 34.75,51.61 34.75,52.22 U1.17
VPP
  Top 0.254: 56.08,42.88 56.08,40.03 55.07,39.01 55.07,38.41 PROG.2 | 56.08,42.88 56.08,43.28 IC6.1 56.08,42.88 | 56.08,42.88 54.46,44.5 54.46,53.24 55.27,54.05 R12.2
  Bottom 0.254: R12.2 55.47,54.25 55.47,56.9 PICKIT2.1

## Text on the board
Bottom: USB | RADIO
tPlace: http://www.gmskhotspot.com | NQSMHS V2.5 NI2O 02/2012 | PWR | PTT | LOW | MED | HIGH | DCOS | Analog frontend by VE2HOT | COS | DCOS | Low | Medium | High | RX | TX
tNames: Serial #